# Altium PCB PCB_EDR Project.pcbdoc
Units mm, origin at the board's own origin, x right, y up, seen from the top; angles counter-clockwise.
Board outline 72.49 x 57.84 mm, 2 copper layers (Top Layer, Bottom Layer); 25 components, 23 nets, 96 pads, 2 vias.
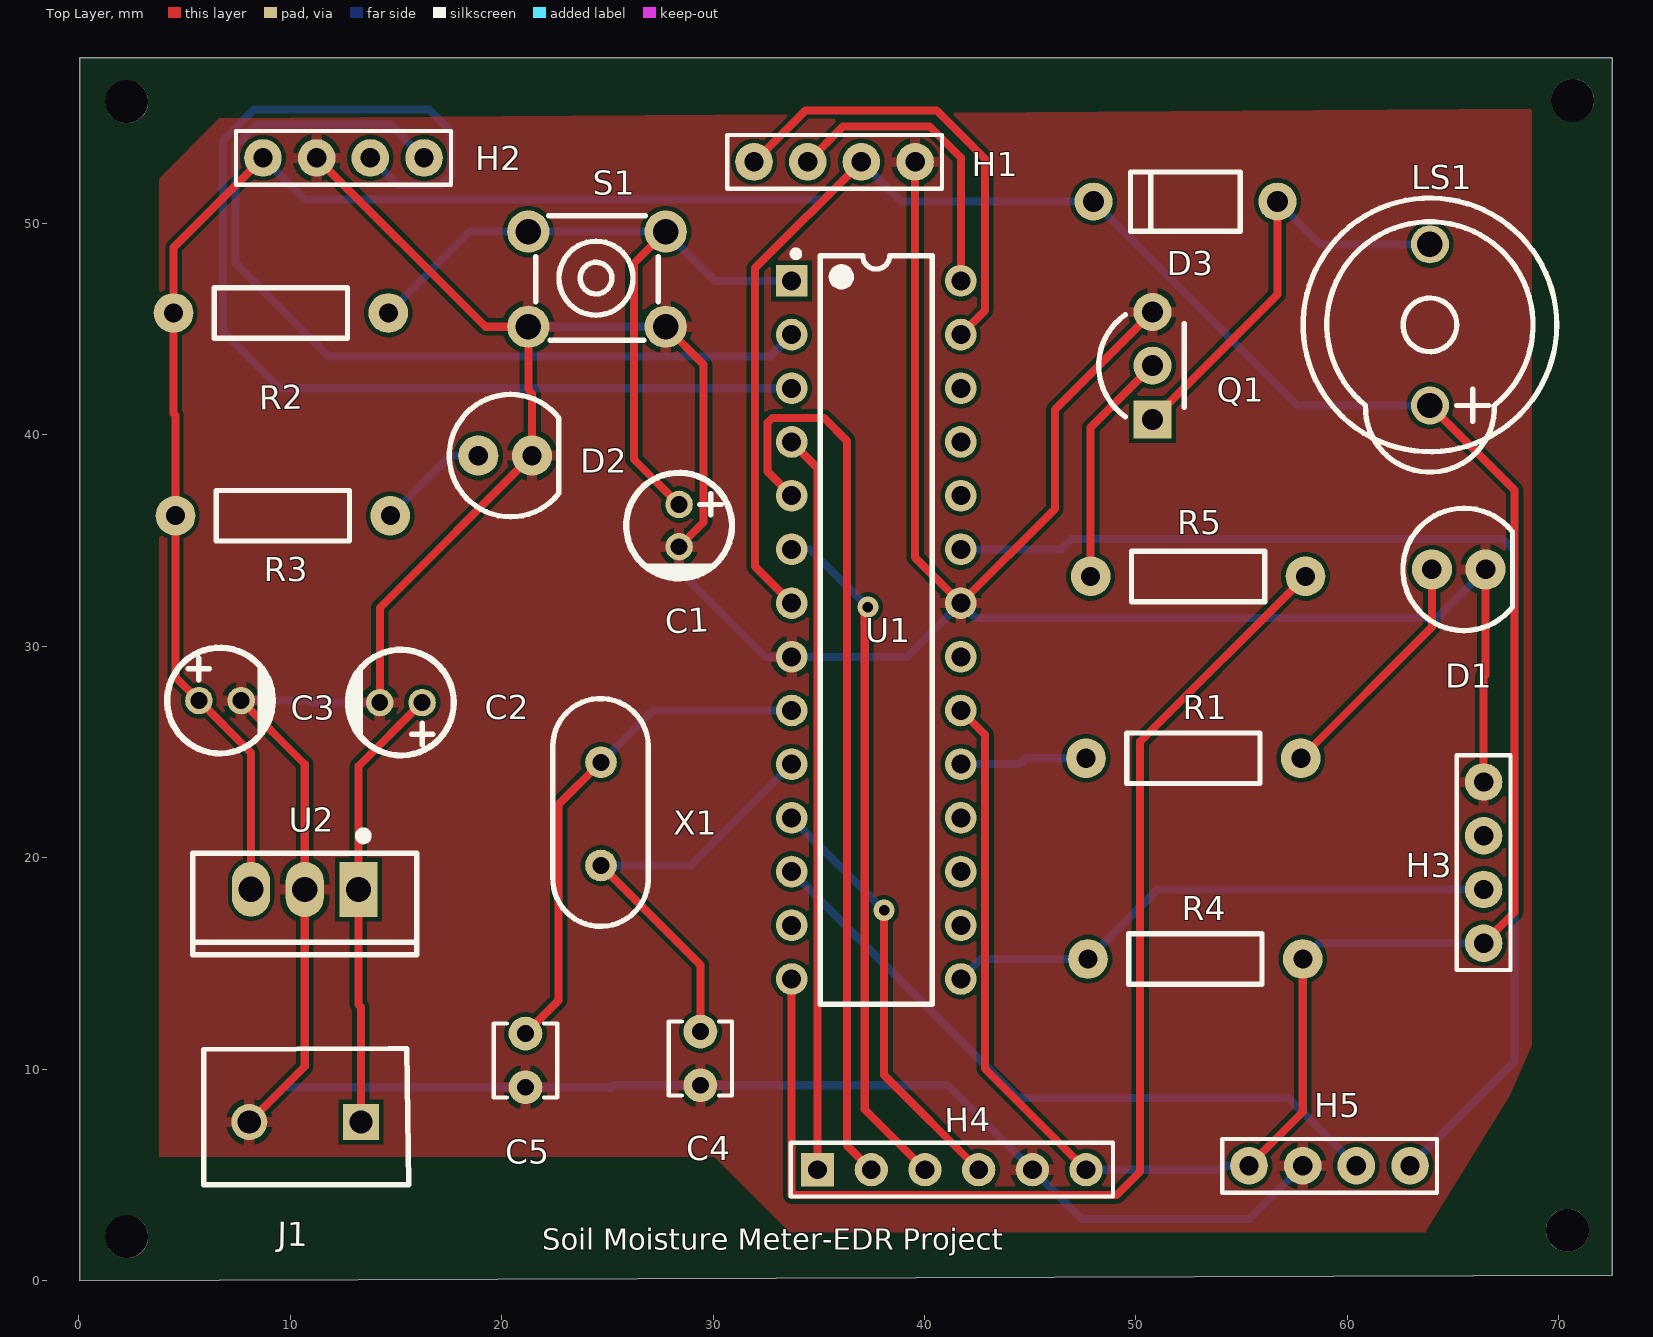
[diagram p0: Top Layer view]
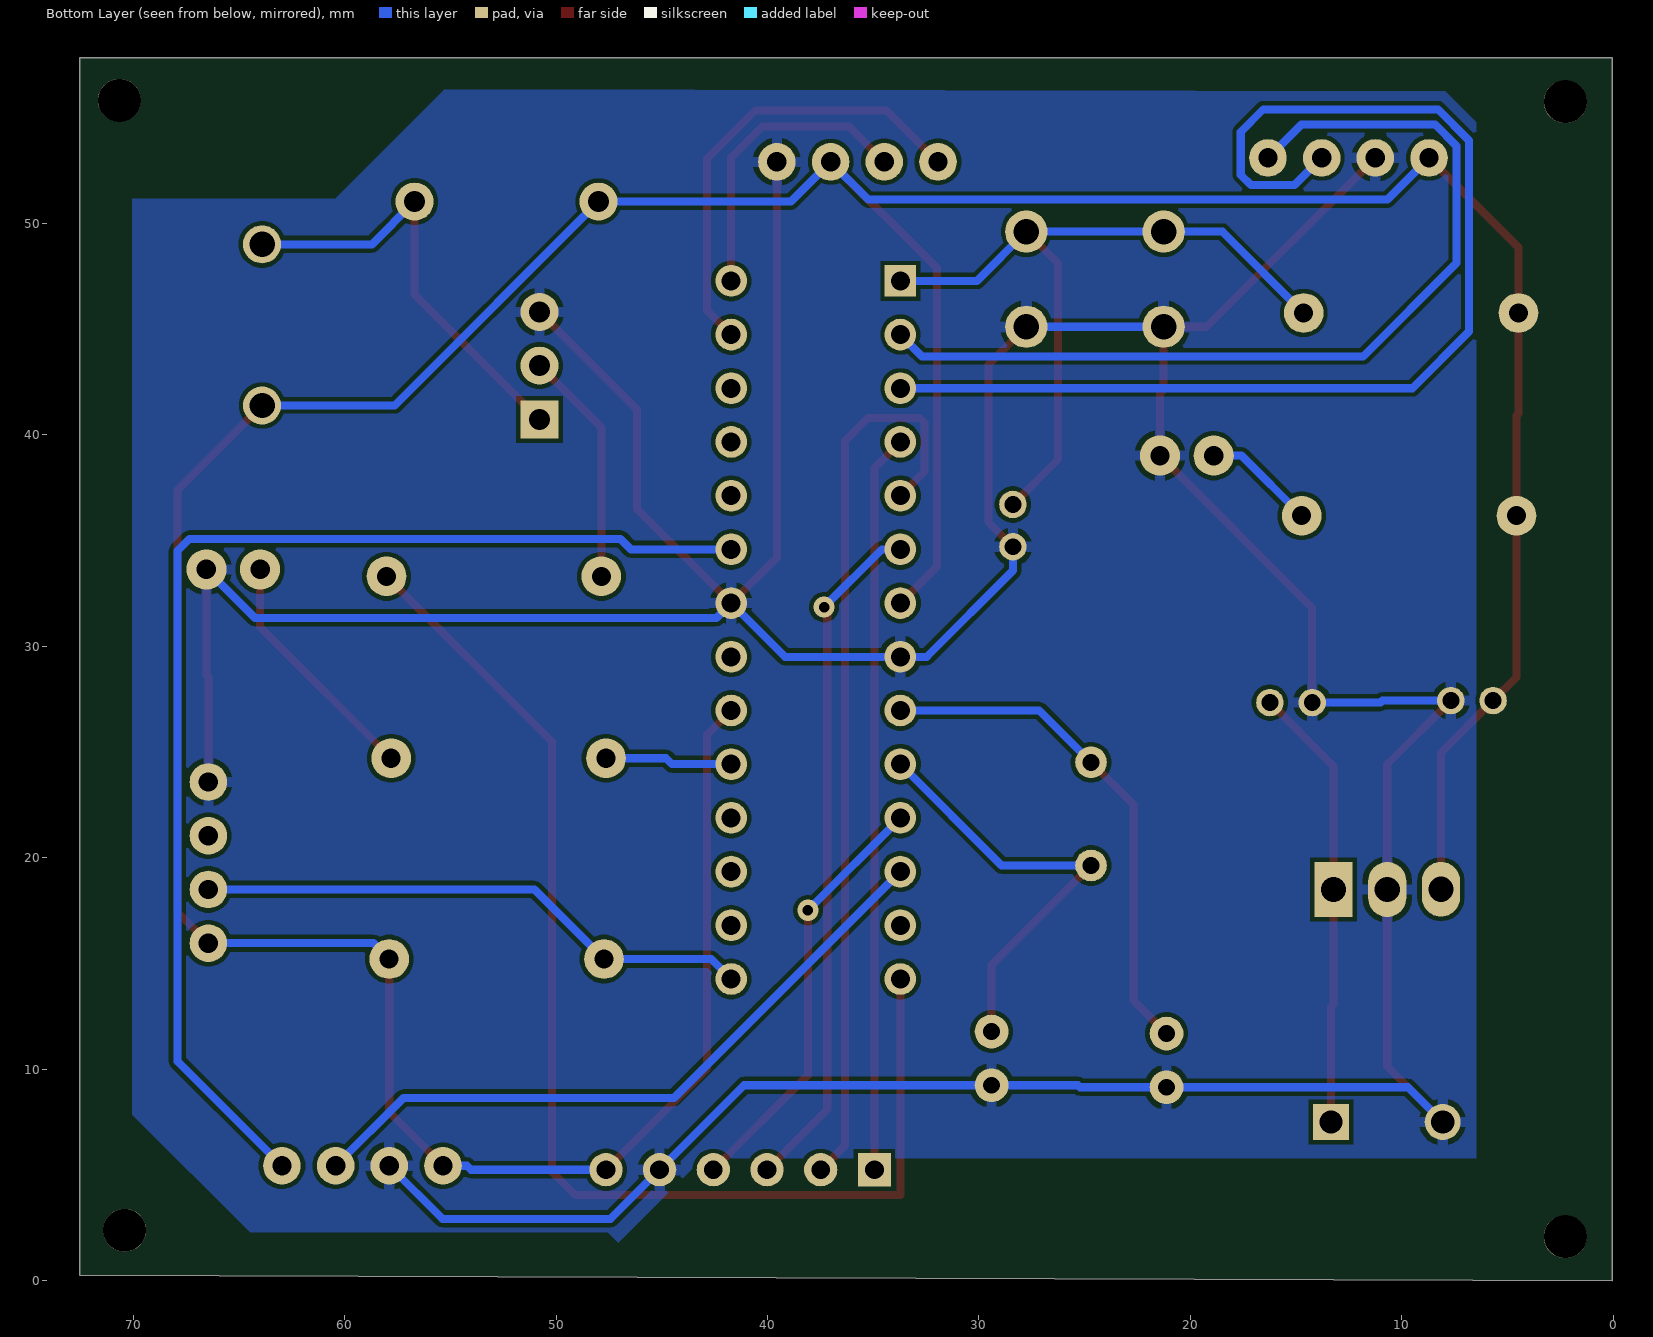
[diagram p1: Bottom Layer view, seen from below]

## Layer stack, top to bottom
Top Solder: solder mask 0.0102, Solder Resist, Dk 3.5
Top Layer: signal copper 0.0356
Dielectric1: dielectric 0.32, FR-4, Dk 4.8
Bottom Layer: signal copper 0.0356
Bottom Solder: solder mask 0.0102, Solder Resist, Dk 3.5

## Board outline
0.046,-0.004 0.046,57.836 72.533,57.836 72.533,0.24

## Design rules (kind name [scope] priority, off if disabled: settings)
BoardOutlineClearance [All] p1: gap=0.2 ignorepadtopadclearanceinfootprint=FALSE except(0.4: Arc-SplitBarrior Arc-SplitContinuation Track-SplitBarrior Track-SplitContinuation SMDPad-SplitBarrior SMDPad-SplitContinuation THPad-SplitBarrior THPad-SplitContinuation Via-SplitBarrior Via-SplitContinuation Fill-SplitBarrior Fill-SplitContinuation Poly-SplitBarrior Poly-SplitContinuation Region-SplitBarrior Region-SplitContinuation Text-SplitBarrior Text-SplitContinuation)
Clearance "Clearance Bottom Layer" [OnLayer('Bottom Layer')] p1: gap=0.203 ignorepadtopadclearanceinfootprint=TRUE except(0.254: Arc-Text Track-Text SMDPad-Text THPad-Text Via-Text Fill-Text Poly-Text Region-Text Text-Text)
Clearance "Clearance Top Layer" [OnLayer('Top Layer')] p2: gap=0.203 ignorepadtopadclearanceinfootprint=TRUE except(0.254: Arc-Text Track-Text SMDPad-Text THPad-Text Via-Text Fill-Text Poly-Text Region-Text Text-Text)
Clearance [All] p3: gap=0.2 ignorepadtopadclearanceinfootprint=FALSE except(0.089: Arc-Arc Arc-Track Arc-SMDPad Track-Track Track-SMDPad SMDPad-SMDPad; 0.127: Arc-Via Track-Via SMDPad-Via THPad-Via Via-Via; 0.254: Arc-Text Track-Text SMDPad-Text THPad-Text Via-Text Fill-Text Poly-Text Region-Text Text-Text)
HoleSize [All] p1: absolutevalues=TRUE maxlimit=6.3 minlimit=0.2 maxpercent=80.000 minpercent=20.000
MinimumAnnularRing [All] p1: minimumring=0.076
MinimumSolderMaskSliver [All] p1: minsoldermaskwidth=0.1
PolygonConnect PolygonConnect_1 [All] p1: thpad.connectstyle=Relief thpad.reliefconductorwidth=0.508 thpad.reliefentries=4 thpad.polygonreliefangle="90 Angle" thpad.airgapwidth=0.254 smdpad.connectstyle=Relief smdpad.reliefconductorwidth=0.508 smdpad.reliefentries=4 smdpad.polygonreliefangle="90 Angle" smdpad.airgapwidth=0.254 via.connectstyle=Direct via.reliefconductorwidth=0.508 via.reliefentries=4 via.polygonreliefangle="90 Angle" via.airgapwidth=0.254
RoutingCorners [All] p1: cornerstyle=Round minsetback=2.54 maxsetback=2.54
RoutingVias [All] p1: holewidth=0.5 width=1 viastyle="Through Hole" minholewidth=0.2 minwidth=0.45 maxholewidth=1 maxwidth=2
SilkToSilkClearance [All] p1: silktosilkclearance=0.1
SilkToSolderMaskClearance [IsPad] p1: minsilkscreentomaskgap=0.01 clearancetoexposedcopper=TRUE
SolderMaskExpansion [All] p1: expansion=0.102 istentingtop=FALSE
Width [All] p1: maxlimit=2.54 minlimit=0.089 preferedwidth=0.381
25 further rules are at their usual default settings.

## Components (designator, comment, footprint, x,y, rotation, side; value= is the part's Value field where it differs from the comment)
C1 "0.1uF" CAP-TH_BD5.0-P2.00-D0.8-FD 28.395,35.706 r270 top
C2 "0.33uF" CAP-TH_BD5.0-P2.00-D0.8-FD 15.238,27.336 r180 top
C3 "0.1uF" CAP-TH_BD5.0-P2.00-D0.8-FD 6.682,27.43 r0 top
C4 "22pF" CAP-TH_L3.5-W3.0-P2.54-D0.8 29.401,10.505 r270 top
C5 "22pF" CAP-TH_L3.5-W3.0-P2.54-D0.8 21.127,10.411 r270 top
D1 "LED" "5MM LED" 64.001,33.635 r0 top
D2 "LED" "5MM LED" 18.899,39.017 r0 top
D3 "1N4001" DO-41_BD2.4-L4.7-P8.70-D0.9-RD 52.343,51.03 r0 top
H1 "4-PIN HEADER" "HEADER - HEADER-FEMALE-2.54_1X4" 34.477,52.91 r0 top
H2 "4-PIN HEADER" "HEADER - HEADER-FEMALE-2.54_1X4" 13.792,53.098 r180 top
H3 "4-PIN HEADER" "HEADER - HEADER-FEMALE-2.54_1X4" 66.447,18.497 r90 top
H4 "4-PIN HEADER" HDR-F-2.54_1X6 40.025,5.24 r0 top
H5 "4-PIN HEADER" "HEADER - HEADER-FEMALE-2.54_1X4" 57.889,5.428 r0 top
J1 "Power" CONN-TH_XHB-2A 13.323,7.497 r0 top
LS1 "BUZZER" DIP-BUZZER-12X6 63.908,45.2 r180 top
Q1 "BC547" TO-92-3_L4.9-W3.7-P2.54-L 50.788,43.273 r90 top
R1 "330Ω" AXIAL-0.4 52.719,24.703 r0 top
R2 "10KΩ" AXIAL-0.4 9.562,45.764 r0 top
R3 "1KΩ" AXIAL-0.4 9.656,36.174 r0 top
R4 "4.7kΩ" AXIAL-0.4 52.813,15.207 r180 top
R5 "220Ω" AXIAL-0.4 52.941,33.307 r180 top
S1 "Reset" KEY-TH_4P-L6.0-W6.0-P4.50 24.512,47.363 r0 top
U1 "ATMEGA328P-PU" DIP-28_L34.6-W7.3-P2.54-LS10.2-BL 37.718,30.772 r270 top
U2 "LM7805" TO-220-3_L10.0-W4.5-P2.54-L 10.689,18.502 r180 top
X1 "16MHz" CRYSTAL-TH_L10.8-W4.5-P4.88 24.7,22.07 r270 top

## Footprints (in the part's own frame and the unit in brackets; to place one, negate y for a bottom-side part, rotate by r counter-clockwise, add the part's x,y. Pads: shape width x height; smd on the part's side, far side on the other; paste and mask are expansions set on the pad)
"5MM LED" [mm]
  round 1.9 hole 0.914: 1(0,0) 2(2.54,0)
  silkscreen extent -1.37,-2.9 3.81,2.9
AXIAL-0.4 [mil]
  round 74 hole 35.4: 1(-200,0) 2(200,0)
  silkscreen extent -124,-47 124,47
CAP-TH_BD5.0-P2.00-D0.8-FD [mm]
  round 1.3 hole 0.8: 1(-1,0) 2(1,0)
  silkscreen extent -2.5,-2.5 2.5,2.5
CAP-TH_L3.5-W3.0-P2.54-D0.8 [mm]
  round 1.6 hole 0.8: 1(-1.27,0) 2(1.27,0)
  silkscreen extent -1.75,-1.5 1.75,1.5
CONN-TH_XHB-2A [mm]
  rect 1.7x1.7 hole 1.1: 1(0.025,0)
  round 1.7 hole 1.1: 2(-5.258,0)
  silkscreen extent -7.42,-2.97 2.29,3.48
CRYSTAL-TH_L10.8-W4.5-P4.88 [mm]
  round 1.5 hole 0.8: 1(-2.44,0) 2(2.44,0)
  silkscreen extent -5.46,-2.28 5.32,2.24
DIP-28_L34.6-W7.3-P2.54-LS10.2-BL [mm]
  rect 1.5x1.5 hole 0.9: 1(-16.51,-4)
  round 1.5 hole 0.9: 2(-13.97,-4) 3(-11.43,-4) 4(-8.89,-4) 5(-6.35,-4) 6(-3.81,-4) 7(-1.27,-4) 8(1.27,-4) 9(3.81,-4) 10(6.35,-4) 11(8.89,-4) 12(11.43,-4) 13(13.97,-4) 14(16.51,-4) 15(16.51,4) 16(13.97,4) 17(11.43,4) 18(8.89,4) 19(6.35,4) 20(3.81,4) 21(1.27,4) 22(-1.27,4) 23(-3.81,4) 24(-6.35,4) 25(-8.89,4) 26(-11.43,4) 27(-13.97,4) 28(-16.51,4)
  silkscreen extent -17.94,-3.95 17.7,2.65
DIP-BUZZER-12X6 [mm]
  round 1.8 hole 1.2: 1(0,3.81) 2(0,-3.81)
  silkscreen extent -6,-6 6,6.96
DO-41_BD2.4-L4.7-P8.70-D0.9-RD [mm]
  round 1.8 hole 1: 1(-4.35,0) 2(4.35,0)
  silkscreen extent -2.6,-1.4 2.6,1.4
HDR-F-2.54_1X6 [mil]
  rect 62x62 hole 35: 1(-200,0)
  round 62 hole 35: 2(-100,0) 3(0,0) 4(100,0) 5(200,0) 6(300,0)
  silkscreen extent -250,-50 350,50
"HEADER - HEADER-FEMALE-2.54_1X4" [mil]
  round 70 hole 36: 1(-100,0) 2(0,0) 3(100,0) 4(200,0)
  silkscreen extent -150,-50 250,50
KEY-TH_4P-L6.0-W6.0-P4.50 [mm]
  round 2 hole 1.2: 1(-3.25,-2.25) 2(3.25,-2.25) 3(3.25,2.25) 4(-3.25,2.25)
  silkscreen extent -2.9,-2.9 2.9,3
TO-92-3_L4.9-W3.7-P2.54-L [mm]
  rect 1.8x1.8 hole 1: 1(-2.54,0)
  round 1.8 hole 1: 2(0,0) 3(2.54,0)
  silkscreen extent -2.41,-1.5 2.41,2.54
TO-220-3_L10.0-W4.5-P2.54-L [mm]
  rect 1.8x2.6 hole 1.2: 1(-2.54,0.005)
  oval 1.8x2.6 hole 1.2: 2(0,0.005) 3(2.54,-0.005)
  silkscreen extent -5.3,-2.73 5.3,3.09

## Free pads (board coordinates)
  round 2.032 hole 2.032 unplated: ""(2.266,2.074) ""(2.266,55.759) ""(70.41,2.379) ""(70.654,55.82)

## Via types
v1: diameter 1, hole 0.5, Top Layer to Bottom Layer, 2 vias

## Nets (pads, with @x,y where several pads share a name; then routed paths per layer and width w, separated by ;. In a path a pad name is that pad's centre, name@x,y a point inside that pad or via, vN(x,y) a via of type N, cw(c..) or ccw(c..) an arc to the next point about the centre after c; other vN are vias at no path point)
5V: C3.1 D3.1 H1.3 H2.4 H3.1 H4.6 H5.1 LS1.1 R2.1 R3.1 R4.1 U1.7 U1.20 U2.3 | length 202.4
  Top Layer w0.381: U2.3 8.149,24.962 C3.1 4.576,28.535 R3.1 4.576,40.918 4.482,41.012 R2.1 4.482,48.869 H2.4 ; U1.7 31.991,33.77 31.991,47.883 H1.3 ; U1.20 42.865,25.816 42.865,10.02 H4.6 ; H5.1 57.893,7.972 R4.1 ; LS1.1 67.909,37.389 67.909,17.42 H3.1
  Bottom Layer w0.381: H2.4 10.681,51.129 35.236,51.129 H1.3 38.898,51.03 D3.1 57.633,41.39 LS1.1 ; H4.6 54.028,5.24 54.217,5.428 H5.1 ; R4.1 58.644,15.957 H3.1
BUT1: H4.1 U1.4 | length 34.9
  Top Layer w0.381: U1.4 34.945,38.436 H4.1
BUT2: H4.2 U1.5 | length 43.2
  Top Layer w0.381: U1.5 32.575,38.266 32.575,40.574 32.806,40.806 35.245,40.806 36.337,39.714 36.337,6.388 H4.2
BUT3: H4.3 U1.6 | length 32.6
  Top Layer w0.381: v1(37.328,31.85) 37.175,31.698 37.175,8.09 H4.3
  Bottom Layer w0.381: U1.6 34.596,34.582 v1(37.328,31.85)
BUT4: H4.4 U1.11 | length 20.3
  Top Layer w0.381: v1(38.09,17.511) 38.09,9.715 H4.4
  Bottom Layer w0.381: U1.11 v1(38.09,17.511)
BUZZER: R5.1 U1.14 | length 58.6
  Top Layer w0.381: U1.14 33.719,4.037 49.088,4.037 50.205,5.155 50.205,25.492 R5.1
D1_1: D1.1 R1.2 | length 11.5
  Top Layer w0.381: R1.2 64.001,30.905 D1.1
DHT11: H3.2 R4.2 U1.15 | length 26.5
  Bottom Layer w0.381: U1.15 42.663,15.207 R4.2 51.024,18.497 H3.2
GND: C1.2 C2.2 C3.2 C4.2 C5.2 D1.2 D2.2 H1.4 H2.3 H3.4 H4.5 H5.2 J1.2 Q1.3 S1.1 S1.2 U1.8 U1.22 U2.2 | length 228
  Top Layer w0.381: C3.2 10.689,24.422 U2.2 10.689,10.121 J1.2 ; H2.3 19.238,45.113 S1.1 21.262,42.136 21.439,41.959 D2.2 14.238,31.816 C2.2 ; S1.2 29.555,43.32 29.555,35.866 C1.2 ; H1.4 39.557,34.204 U1.22 46.167,36.491 46.167,41.192 Q1.3 ; H3.4 66.447,28.548 66.541,28.642 D1.2
  Bottom Layer w0.381: C3.2 10.912,27.43 11.006,27.336 C2.2 ; J1.2 9.71,9.141 C5.2 25.212,9.141 25.306,9.235 C4.2 41.109,9.235 H4.5 47.425,2.92 55.381,2.92 H5.2 ; S1.1 S1.2 ; C1.2 28.395,33.577 32.47,29.502 U1.8 39.178,29.502 U1.22 42.419,31.342 64.248,31.342 D1.2
MOISTURESENSOR: H5.4 U1.23 | length 57.8
  Bottom Layer w0.381: U1.23 46.461,34.582 46.954,35.076 67.35,35.076 67.909,34.517 67.909,10.368 H5.4
MOISTURESENSOR-D: H5.3 U1.12 | length 32.5
  Bottom Layer w0.381: U1.12 44.426,8.635 57.223,8.635 H5.3
OSC1: C5.1 U1.9 X1.1 | length 24.3
  Top Layer w0.381: C5.1 22.697,13.251 22.697,22.507 X1.1
  Bottom Layer w0.381: X1.1 27.152,26.962 U1.9
OSC2: C4.1 U1.10 X1.2 | length 20.8
  Top Layer w0.381: X1.2 29.401,14.929 C4.1
  Bottom Layer w0.381: X1.2 28.927,19.63 U1.10
Q1_1: D3.2 LS1.2 Q1.1 | length 20.8
  Top Layer w0.381: Q1.1 56.693,46.639 D3.2
  Bottom Layer w0.381: D3.2 58.713,49.01 LS1.2
R1_1: R1.1 U1.19 | length 6
  Bottom Layer w0.381: U1.19 44.516,24.422 44.797,24.703 R1.1
R3_2: D2.1 R3.2 | length 5.3
  Bottom Layer w0.381: R3.2 17.579,39.017 D2.1
R5_2: Q1.2 R5.2 | length 11.2
  Top Layer w0.381: R5.2 47.861,40.346 Q1.2
RX: H2.1 U1.2 | length 44.1
  Bottom Layer w0.381: H2.1 14.745,54.685 8.422,54.685 7.406,53.669 7.406,48.132 11.826,43.712 32.688,43.712 U1.2
S1_3: C1.1 R2.2 S1.3 S1.4 U1.1 | length 36.1
  Top Layer w0.381: S1.3 26.253,48.104 26.253,38.848 C1.1
  Bottom Layer w0.381: R2.2 18.491,49.613 S1.4 S1.3 30.092,47.282 U1.1
SCL: H1.2 U1.28 | length 14.4
  Top Layer w0.381: H1.2 36.15,54.583 40.249,54.583 41.718,53.113 U1.28
SDA: H1.1 U1.27 | length 21.7
  Top Layer w0.381: H1.1 34.372,55.345 40.579,55.345 42.865,53.059 42.865,45.889 U1.27
TX: H2.2 U1.3 | length 55.5
  Bottom Layer w0.381: H2.2 15.076,51.815 17.135,51.815 17.617,52.297 17.617,54.329 16.55,55.396 8.295,55.396 6.822,53.923 6.822,44.88 9.5,42.202 U1.3
VCC: C2.1 J1.1 U2.1 | length 21.1
  Top Layer w0.381: J1.1 13.349,12.927 13.229,13.047 U2.1 13.229,24.327 C2.1
pads on no net: H3.3 U1.13 U1.16 U1.17 U1.18 U1.21 U1.24 U1.25 U1.26

## Polygon pours and split planes (outlines as drawn)
GND on Bottom Layer "GND_L02_P006" (solid, remove dead copper, pour order 6): 7.951,56.246 6.485,54.779 6.485,5.793 43.053,5.793 47.062,1.784 47.551,2.273 64.466,2.273 70.04,7.846 70.04,51.161 60.457,51.161 55.275,56.343
GND on Top Layer "GND_L01_P002" (solid, remove dead copper, pour order 2): 6.657,54.976 3.798,52.118 3.798,5.85 30.058,5.85 33.631,2.278 63.731,2.278 63.731,2.367 67.661,8.709 68.733,11.12 68.733,55.422

## Silkscreen, mask and mechanical layers (free items; w line width, h text height)
Top Overlay:
  text "Soil Moisture Meter-EDR Project" at 21.93,1.451 h1
Document:
  lines w0.254: 0.63,0.656 0.694,0.721 ; 71.838,0.721 71.902,0.785 ; 71.851,57.261 71.902,57.312